# Allegro board cockpit_transmissionshifterunit.brd
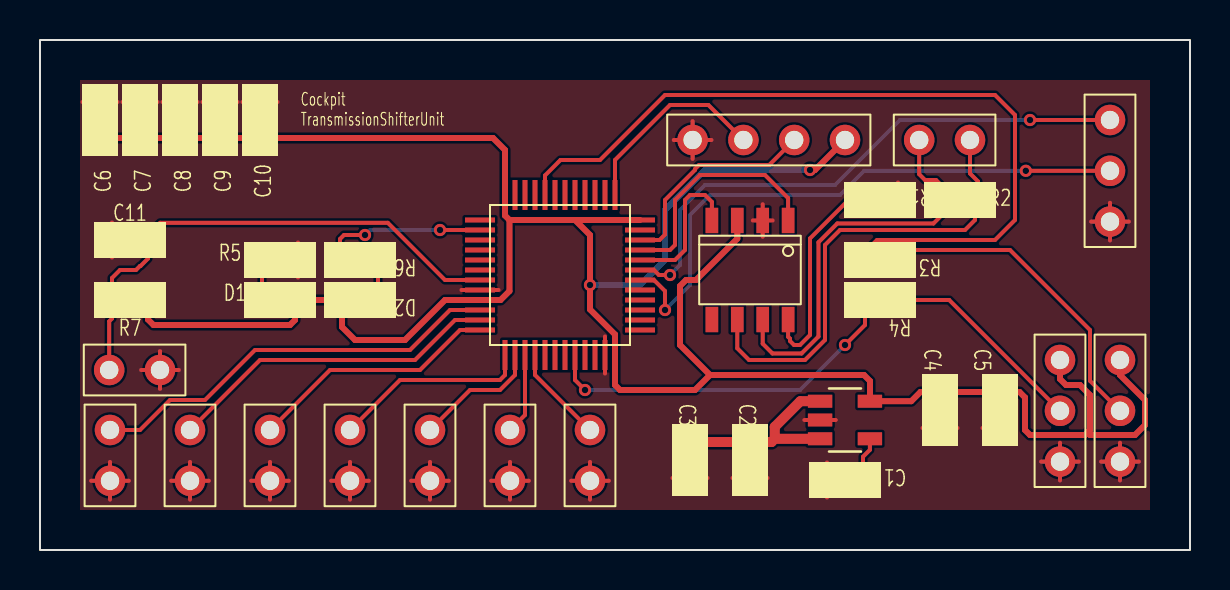
[diagram p0: board, top side]
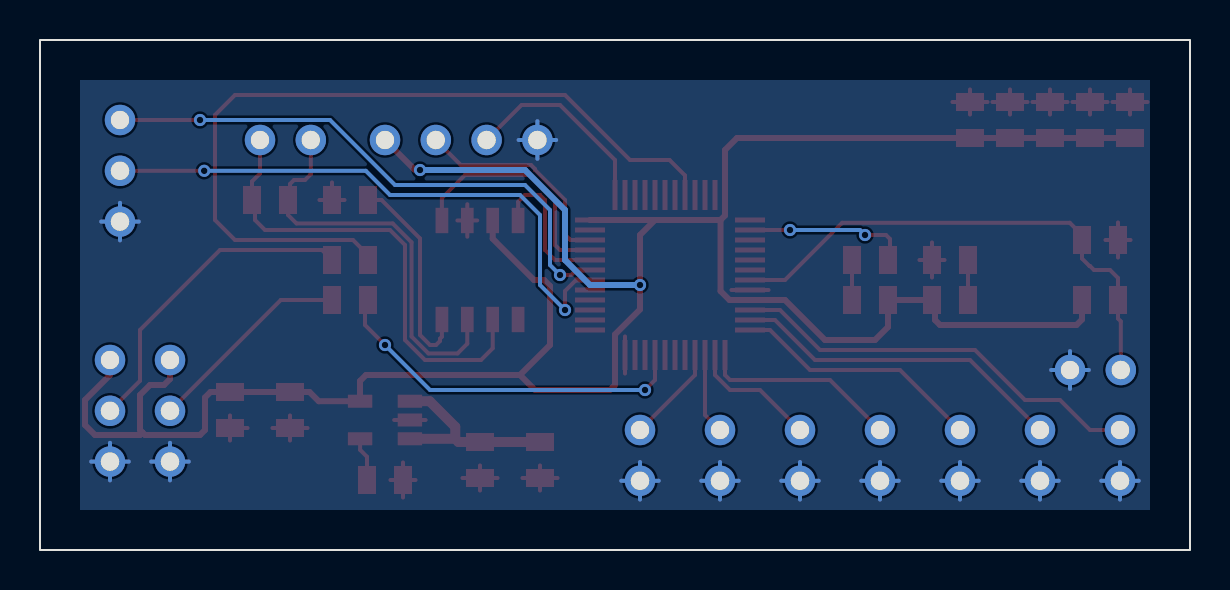
[diagram p1: board, bottom side, seen from below]

Outline 57.5 x 25.5 mm; copper layers: TOP, BOTTOM. Coordinates in mm from the lower left corner of the outline.
Outline path: rectangle 0,0 57.5,25.5

## Design rules (mm)
constraint set DEFAULT: 
nets with their own width: min track width 0.3; nets VCC3V3
nets with their own width: min track width 0.5; nets 5V

## Placement (name value [footprint] x y rotation side)
C1  223,0805  [C0805]  40.25 3.5 180 top
C2  104,0805  [C0805]  35.5 4.5 270 top
C3  105,0805  [C0805]  32.5 4.5 270 top
C4  105,0805  [C0805]  45 7 270 top
C5  104,0805  [C0805]  48 7 270 top
C6  104,0805  [C0805]  3 21.5 90 top
C7  104,0805  [C0805]  5 21.5 90 top
C8  104,0805  [C0805]  7 21.5 90 top
C9  104,0805  [C0805]  9 21.5 90 top
C10  104,0805  [C0805]  11 21.5 90 top
C11  104,0805  [C0805]  4.5 15.5 0 top
D1  LED  [L0805]  12 12.5 0 top
D2  LED  [L0805]  16 12.5 180 top
J1  CAN_HEADER  [JUMPER2]  46.5 20.5 180 top
J2  SW_HEADER  [JUMPER2]  3.5 6 270 top
J3  SW_HEADER  [JUMPER2]  7.5 6 270 top
J4  SW_HEADER  [JUMPER2]  11.5 6 270 top
J5  SW_HEADER  [JUMPER2]  15.5 6 270 top
J6  SW_HEADER  [JUMPER2]  19.5 6 270 top
J7  SW_HEADER  [JUMPER2]  23.5 6 270 top
J8  SW_HEADER  [JUMPER2]  27.5 6 270 top
J10  UART_HEADER  [JUMPER3]  53.5 21.5 270 top
J11  SWD  [JUMPER4]  40.25 20.5 180 top
R1  10K  [R0805]  42 17.5 180 top
R2  120,0805  [R0805]  46 17.5 0 top
R3  100K,0805  [R0805]  42 14.5 180 top
R4  100K,0805  [R0805]  42 12.5 180 top
R5  510R,0805  [R0805]  12 14.5 0 top
R6  510R,0805  [R0805]  16 14.5 180 top
R7  10K,0805  [R0805]  4.5 12.5 0 top
SW2  BOOT0 SW  [JUMPER3]  54 9.5 270 top
SW3  BOOT1 SW  [JUMPER3]  51 9.5 270 top
SW4  RST_SW  [JUMPER2]  6 9 180 top
U1  RT9193-33  [SOT-23-5]  40.25 6.5 0 top
U2  STM32F103C8T6  [LQFP48]  22 16.5 0 top
U3  SN65HVD230  [SOIC8]  35.5 14 270 top

## Library data of the parts
C1-C11 = CAP NP
D1 D2 = LED
J1-J8 = HEADER 2: User Part Number: ***
J10 = HEADER 3: User Part Number: ***
J11 = HEADER 4: User Part Number: ***
R1-R7 = R
SW2 SW3 = SW SLIDE-SPDT: User Part Number: ***
SW4 = SW PUSHBUTTON: User Part Number: ***
U1 = RT9193-33
U2 = STM32F103C8T6
U3 = SN65HVD230: Tolerance: ***; User Part Number: ***

## Footprints (pads in the part's own frame, mm; a bottom-side part is the same pattern mirrored in y, then rotated)
C0805
  rect 0.9x1.4 smd: 1(-0.9,0) 2(0.9,0)
JUMPER2
  round 1.524 hole 0.914: 1(0,0) 2(2.54,0)
JUMPER3
  round 1.524 hole 0.914: 1(0,0) 2(2.54,0) 3(5.08,0)
JUMPER4
  round 1.524 hole 0.914: 1(0,0) 2(2.54,0) 3(5.08,0) 4(7.62,0)
L0805
  rect 0.9x1.4 smd: 1(-0.9,0) 2(0.9,0)
LQFP48
  rect 1.5x0.25 smd: 1(0,0) 2(0,-0.5) 3(0,-1) 4(0,-1.5) 5(0,-2) 6(0,-2.5) 7(0,-3) 8(0,-3.5) 9(0,-4) 10(0,-4.5) 11(0,-5) 12(0,-5.5) 25(8,-5.5) 26(8,-5) 27(8,-4.5) 28(8,-4) 29(8,-3.5) 30(8,-3) 31(8,-2.5) 32(8,-2) 33(8,-1.5) 34(8,-1) 35(8,-0.5) 36(8,0)
  rect 0.25x1.5 smd: 13(1.25,-6.75) 14(1.75,-6.75) 15(2.25,-6.75) 16(2.75,-6.75) 17(3.25,-6.75) 18(3.75,-6.75) 19(4.25,-6.75) 20(4.75,-6.75) 21(5.25,-6.75) 22(5.75,-6.75) 23(6.25,-6.75) 24(6.75,-6.75) 37(6.75,1.25) 38(6.25,1.25) 39(5.75,1.25) 40(5.25,1.25) 41(4.75,1.25) 42(4.25,1.25) 43(3.75,1.25) 44(3.25,1.25) 45(2.75,1.25) 46(2.25,1.25) 47(1.75,1.25) 48(1.25,1.25)
R0805
  rect 0.9x1.4 smd: 1(-0.9,0) 2(0.9,0)
SOIC8
  rect 1.27x0.635 smd: 1(-2.477,1.905) 2(-2.477,0.635) 3(-2.477,-0.635) 4(-2.477,-1.905) 5(2.477,-1.905) 6(2.477,-0.635) 7(2.477,0.635) 8(2.477,1.905)
SOT-23-5
  rect 1.22x0.65 smd: 1(-1.245,0.94) 2(-1.245,0) 3(-1.245,-0.94) 4(1.245,-0.94) 5(1.245,0.94)

## Nets
5V: C2.1 C3.1 U1.1 U1.3
GND: C1.2 C2.2 C3.2 C4.2 C5.2 C6.2 C7.2 C8.2 C9.2 C10.2 C11.1 J2.2 J3.2 J4.2 J5.2 J6.2 J7.2 J8.2 J10.3 J11.4 R1.1 R5.2 SW2.3 SW3.3 SW4.1 U1.2 U2.8 U2.23 U2.35 U2.47(VSS_3) U3.2
VBAT: U2.1
VCC3V3: C4.1 C5.1 C6.1 C7.1 C8.1 C9.1 C10.1 D1.2 D2.2 J11.1 R7.2 SW2.1 SW3.1 U1.5(VOUT) U2.9 U2.24 U2.36 U2.48 U3.3
BOOT0: R3.2 U2.44
BOOT1: R4.2 U2.20
CAN_RX: U2.32 U3.4
CAN_TX: U2.33 U3.1
LED: R6.2 U2.2
PA0: J2.1 U2.10
PA1: J3.1 U2.11
PA2: J4.1 U2.12
PA3: J5.1 U2.13
PA4: J6.1 U2.14
PA5: J7.1 U2.15
PA6: J8.1 U2.16
RESET: C11.2 R7.1 SW4.2 U2.7
SWCLK: J11.3 U2.37
SWIO: J11.2 U2.34
USART1_RX: J10.1 U2.31
USART1_TX: J10.2 U2.30
N00099: C1.1 U1.4
N03386: J1.2 R2.1 U3.7
N03415: J1.1 R2.2 U3.6
N027637: R1.2 U3.8
N059341: R3.1 SW2.2
N065461: R4.1 SW3.2
N077241: D1.1(CATHODE) R5.1
N079251: D2.1(CATHODE) R6.1

Pads without a net: U2 3 4 5 6 17 18 19 21 22 25 26 27 28 29 38 39 40 41 42 43 45 46; U3 5

## Via types
v1: diameter 0.61, hole 0.33, TOP to BOTTOM, 10 vias

## Routing (per net, layer and track width the routed paths; a pad name or vN(x,y) marks a point on that pad's centre or on a via; arc(x,y) is an arc through that point)
5V: length 10
  TOP w0.5: 36.74,5.56 36.58,5.4 C2.1 C3.1 ; 36.74,5.56 U1.3 ; 36.74,5.56 36.74,6.16 38.02,7.44 U1.1
GND: length 135.5
  TOP w0.2: C7.2 5,23.03 ; C7.2 4.12,22.4 ; C7.2 5.88,22.4 ; C7.2 5,21.77 ; 2.56,3.46 J2.2 ; J2.2 3.5,2.52 ; J2.2 4.44,3.46 ; J2.2 3.5,4.4 ; J4.2 12.44,3.46 ; J4.2 11.5,4.4 ; J4.2 11.5,2.52 ; J4.2 10.56,3.46 ; J5.2 15.5,4.4 ; J5.2 14.56,3.46 ; J5.2 15.5,2.52 ; J5.2 16.44,3.46 ; 7.5,2.52 J3.2 ; J3.2 7.5,4.4 ; J3.2 6.56,3.46 ; J3.2 8.44,3.46 ; 35.64,16.48 U3.2 ; U3.2 36.13,17.29 ; U3.2 36.13,15.66 ; U3.2 36.63,16.48 ; 3,21.77 C6.2 ; C6.2 3.88,22.4 ; C6.2 2.12,22.4 ; C6.2 3,23.03 ; 34.62,3.6 C2.2 ; C2.2 36.38,3.6 ; C2.2 35.5,4.23 ; C2.2 35.5,2.97 ; R5.2 12.9,15.38 ; R5.2 13.53,14.5 ; R5.2 12.9,13.62 ; R5.2 12.27,14.5 ; 5.06,9 SW4.1 ; SW4.1 6.94,9 ; SW4.1 6,9.94 ; SW4.1 6,8.06 ; 38.22,6.5 U1.2 39.79,6.5 ; C4.2 45.88,6.1 ; C4.2 44.12,6.1 ; C4.2 45,6.73 ; C4.2 45,5.47 ; C3.2 32.5,4.23 ; C3.2 32.5,2.97 ; C3.2 31.62,3.6 ; C3.2 33.38,3.6 ; C9.2 9.88,22.4 ; C9.2 9,23.03 ; C9.2 9,21.77 ; C9.2 8.12,22.4 ; R1.1 43.53,17.5 ; R1.1 42.9,18.38 ; R1.1 42.27,17.5 ; C8.2 7,23.03 ; C8.2 7.88,22.4 ; C8.2 7,21.77 ; C8.2 6.12,22.4 ; J10.3 53.5,17.36 ; J10.3 52.56,16.42 ; J10.3 54.44,16.42 ; J10.3 53.5,15.48 ; 2.97,15.5 C11.1 ; C11.1 3.6,14.62 ; C11.1 3.6,16.38 ; C11.1 4.23,15.5 ; J8.2 27.5,4.4 ; J8.2 28.44,3.46 ; J8.2 26.56,3.46 ; J8.2 27.5,2.52 ; SW2.3 54.94,4.42 ; SW2.3 54,5.36 ; SW2.3 53.06,4.42 ; SW2.3 54,3.48 ; 22.93,13 U2.8 21.07,13 ; 28.25,8.82 U2.23 28.25,10.68 ; J7.2 24.44,3.46 ; J7.2 23.5,4.4 ; J7.2 23.5,2.52 ; J7.2 22.56,3.46 ; 50.06,4.42 SW3.3 ; SW3.3 51,3.48 ; SW3.3 51,5.36 ; SW3.3 51.94,4.42 ; 48,5.47 C5.2 ; C5.2 47.12,6.1 ; C5.2 48,6.73 ; C1.2 39.35,4.38 ; C1.2 39.98,3.5 ; C1.2 38.72,3.5 ; C1.2 39.35,2.62 ; J6.2 20.44,3.46 ; J6.2 18.56,3.46 ; J6.2 19.5,2.52 ; J6.2 19.5,4.4 ; J11.4 33.57,20.5 ; J11.4 31.69,20.5 ; J11.4 32.63,21.44 ; J11.4 32.63,19.56 ; C10.2 11,23.03 ; C10.2 10.12,22.4 ; C10.2 11.88,22.4 ; C10.2 11,21.77
  BOTTOM w0.2: 51,3.48 SW3.3 ; SW3.3 50.06,4.42 ; SW3.3 51,5.36 ; SW3.3 51.94,4.42 ; 23.5,2.52 J7.2 ; J7.2 24.44,3.46 ; J7.2 22.56,3.46 ; J7.2 23.5,4.4 ; J10.3 53.5,17.36 ; J10.3 53.5,15.48 ; J10.3 52.56,16.42 ; J10.3 54.44,16.42 ; SW2.3 54,5.36 ; SW2.3 54,3.48 ; SW2.3 54.94,4.42 ; SW2.3 53.06,4.42 ; 19.5,2.52 J6.2 ; J6.2 18.56,3.46 ; J6.2 19.5,4.4 ; J6.2 20.44,3.46 ; 11.5,2.52 J4.2 ; J4.2 11.5,4.4 ; J4.2 12.44,3.46 ; J4.2 10.56,3.46 ; 14.56,3.46 J5.2 ; J5.2 16.44,3.46 ; J5.2 15.5,2.52 ; J5.2 15.5,4.4 ; 26.56,3.46 J8.2 ; J8.2 27.5,2.52 ; J8.2 28.44,3.46 ; J8.2 27.5,4.4 ; J11.4 33.57,20.5 ; J11.4 32.63,19.56 ; J11.4 31.69,20.5 ; J11.4 32.63,21.44 ; 3.5,2.52 J2.2 ; J2.2 4.44,3.46 ; J2.2 2.56,3.46 ; J2.2 3.5,4.4 ; 6,8.06 SW4.1 ; SW4.1 6,9.94 ; SW4.1 5.06,9 ; SW4.1 6.94,9 ; J3.2 8.44,3.46 ; J3.2 6.56,3.46 ; J3.2 7.5,2.52 ; J3.2 7.5,4.4
VCC3V3: length 132
  TOP w0.3: 33.5,8.75 41.2,8.75 41.5,8.45 41.5,7.44 U1.5 43.56,7.44 44.02,7.9 C4.1 C5.1 48.98,7.9 49.25,7.63 49.25,6 49.5,5.75 52.25,5.75 52.37,5.87 ; 33.5,8.75 32,10.25 32,13.2 32.3,13.5 32.8,13.5 34.87,15.56 U3.3 ; 33.5,8.75 32.75,8 29,8 28.75,8.25 U2.24 28.75,10.78 27.5,12.03 v1(27.5,13.25) 27.5,15.75 26.75,16.5 ; 26.75,16.5 23.47,16.5 ; 26.75,16.5 U2.36 ; 23.47,16.5 23.25,16.72 U2.48 23.25,20 22.65,20.6 C10.1 C9.1 C8.1 C7.1 C6.1 ; 23.47,16.5 23.47,12.95 23.03,12.5 U2.9 20.25,12.5 18.25,10.5 15.75,10.5 15.1,11.15 D2.2 D1.2 12.75,12.35 12.75,11.5 12.5,11.25 5.67,11.25 5.4,11.52 R7.2 ; SW2.1 54,8.75 55.25,7.5 55.25,6.25 54.75,5.75 52.5,5.75 52.37,5.87 ; J11.1 38.75,19 v1(38.5,19) ; 52.37,5.87 52.5,6 52.5,7.75 52,8.25 51.3,8.25 51,8.55 SW3.1
  BOTTOM w0.3: v1(27.5,13.25) 30,13.25 31.25,14.5 31.25,17 33.25,19 v1(38.5,19)
BOOT0: length 40.4
  TOP w0.2: R3.2 41.1,14.75 41.85,15.5 47.75,15.5 48.75,16.5 48.75,21.75 47.75,22.75 31.25,22.75 28,19.5 26.02,19.5 25.25,18.73 U2.44
BOOT1: length 18.6
  TOP w0.2: v1(40.25,10.25) 41.25,11.25 41.25,12.35 R4.2 ; v1(27.25,8) 26.75,8.5 U2.20
  BOTTOM w0.2: v1(40.25,10.25) 38,8 v1(27.25,8)
CAN_RX: length 7.5
  TOP w0.2: U3.4 33.59,17.41 33.25,17.75 32.5,17.75 32.25,17.5 32.25,15 31.75,14.5 U2.32
CAN_TX: length 11.9
  TOP w0.2: U2.33 31.5,15 31.75,15.25 31.75,17.5 33,18.75 36.25,18.75 37.41,17.59 U3.1
LED: length 8.3
  TOP w0.2: R6.2 15,14.6 15,15.55 15.2,15.75 v1(16.25,15.75) ; U2.2 v1(20,16)
  BOTTOM w0.2: v1(16.25,15.75) 16.5,16 v1(20,16)
PA0: length 21
  TOP w0.2: J2.1 5,6 6.5,7.5 8.25,7.5 10.75,10 18.5,10 20.5,12 U2.10
PA1: length 16.8
  TOP w0.2: J3.1 11,9.5 18.75,9.5 20.75,11.5 U2.11
PA2: length 12.6
  TOP w0.2: J4.1 14.5,9 19,9 21,11 U2.12
PA3: length 9.9
  TOP w0.2: U2.13 23.25,8.75 23,8.5 18,8.5 J5.1
PA4: length 6.4
  TOP w0.2: J6.1 21.5,8 23,8 23.75,8.75 U2.14
PA5: length 4.1
  TOP w0.2: U2.15 24.25,6.75 J7.1
PA6: length 4.9
  TOP w0.2: J8.1 24.75,8.75 U2.16
RESET: length 26.1
  TOP w0.2: SW4.2 3.46,11.43 3.6,11.57 R7.1 3.6,13.6 4,14 4.8,14 5,14.2 5.03,14.2 5.4,14.57 C11.2 5.4,15.75 6.01,16.36 17.39,16.36 20.25,13.5 U2.7
SWCLK: length 10
  TOP w0.2: J11.3 33.42,22.25 31.5,22.25 28.75,19.5 U2.37
SWIO: length 10.8
  TOP w0.2: U2.34 30.98,15.5 31.25,15.77 31.25,17.5 32.75,19 32.75,19.05 32.95,19.25 36.46,19.25 J11.2
USART1_RX: length 28.4
  TOP w0.2: U2.31 30.7,14 30.95,13.75 v1(31.5,13.75) ; J10.1 v1(49.5,21.5)
  BOTTOM w0.2: v1(31.5,13.75) 32,14.25 32,17 33.25,18.25 39.75,18.25 43,21.5 v1(49.5,21.5)
USART1_TX: length 29.6
  TOP w0.2: U2.30 30.7,13.5 31.25,12.95 v1(31.25,12) ; J10.2 v1(49.29,18.96)
  BOTTOM w0.2: v1(31.25,12) 32.5,13.25 32.5,16.75 33.5,17.75 40,17.75 41.21,18.96 v1(49.29,18.96)
N00099: length 2.2
  TOP w0.2: C1.1 41.15,4.66 41.49,5.01 U1.4
N03386: length 20.5
  TOP w0.2: U3.7 36.13,10.31 36.62,9.83 38.08,9.83 38.92,10.67 38.92,15.39 39.86,16.33 44.67,16.33 45.1,16.75 R2.1 45,17.6 45,18.3 44.8,18.5 44.25,18.5 43.96,18.79 J1.2
N03415: length 23.5
  TOP w0.2: J1.1 46.5,18.83 46.9,18.43 R2.2 46.75,17.35 46.75,16.5 46.25,16 40,16 39.25,15.25 39.25,10.5 38.25,9.5 35.45,9.5 34.87,10.09 U3.6
N027637: length 10.6
  TOP w0.2: U3.8 37.41,10.66 37.5,10.57 37.5,10.45 37.7,10.25 38,10.25 38.5,10.75 38.5,15.58 40.42,17.5 R1.2
N059341: length 16.1
  TOP w0.2: R3.1 43.4,15 48.5,15 52.5,11 52.5,8.46 SW2.2
N065461: length 10.4
  TOP w0.2: R4.1 45.46,12.5 SW3.2
N077241: length 2
  TOP w0.2: R5.1 D1.1
N079251: length 2
  TOP w0.2: R6.1 D2.1

## Copper pours and planes (outline as drawn; the poured copper is in the pictures)
GND on TOP, BOTTOM: 2,23.5 55.5,23.5 55.5,2 2,2

## Text on the board
Ref Des/Silkscreen Top: Cockpit | TransmissionShifterUnit
